# Altium PCB ISO_board.PcbDoc
Units mm, origin at the board's own origin, x right, y up, seen from the top; angles counter-clockwise.
Board outline 128 x 36.5 mm, 2 copper layers (Top Layer, Bottom Layer); 63 components, 30 nets, 190 pads, 299 vias.
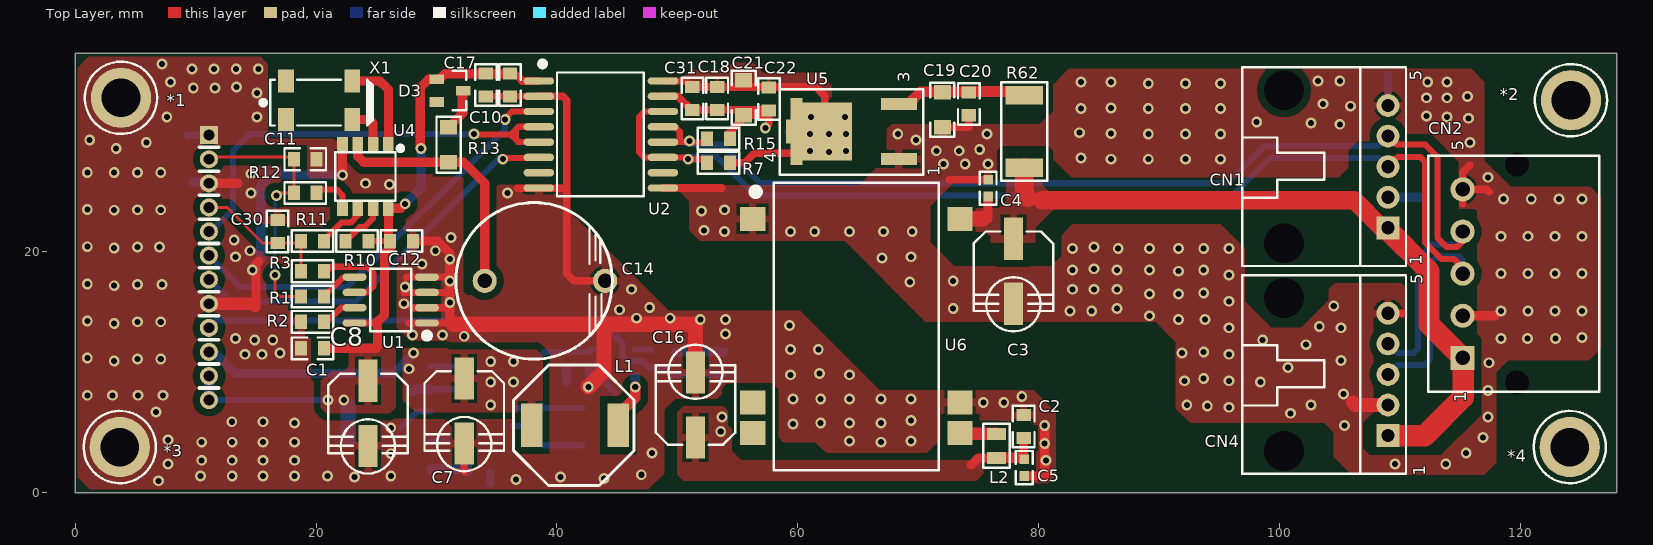
[diagram p0: Top Layer view]
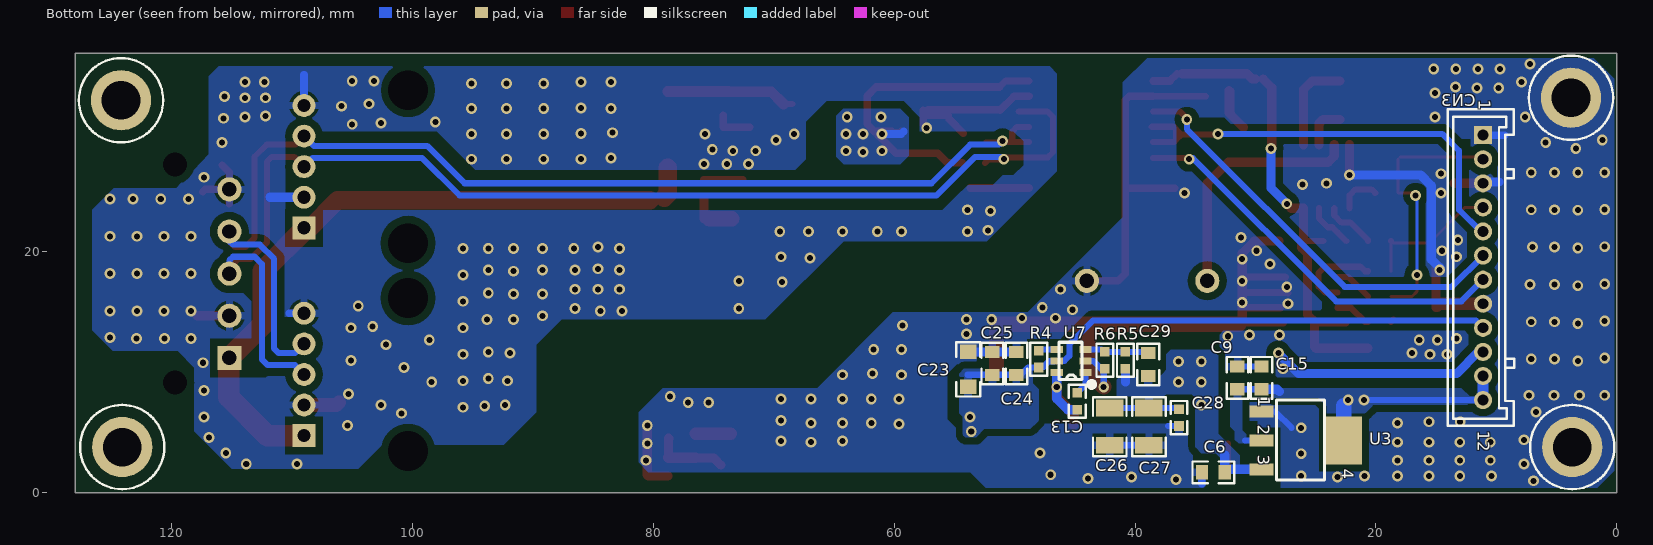
[diagram p1: Bottom Layer view, seen from below]

## Layer stack, top to bottom
Top Layer: signal copper 0.0356
Dielectric: dielectric 0.32, FR-4, Dk 4.8
Bottom Layer: signal copper 0.0356

## Board outline
0,0 0,36.5 128,36.5 128,0

## Design rules (kind name [scope] priority, off if disabled: settings)
Clearance Clearance_2 [IsRegion] p1: gap=0.6
Clearance Clearance_1 [(IsVia OR IsPad) vs (IsPad OR IsVia)] p2: gap=0.35
Clearance [All] p3: gap=0.3
ComponentClearance [All] p1 off: gap=0.254 collisioncheckmode=3 verticalgap=0.254 showdistances=FALSE
DiffPairsRouting [All] p1: maxlimit=0.762 minlimit=0.3 mostfreqgap=0.5 maxuncoupledlength=12.7
Height [All] p1 off: minheight=0 maxheight=25.4 prefheight=12.7
HoleSize [All] p1: absolutevalues=TRUE maxlimit=10 minlimit=0.025 maxpercent=80.000 minpercent=20.000
PolygonConnect PolygonConnect_4 [(InComponent('*1') OR InComponent('*3'))] p1: connectstyle=Direct reliefconductorwidth=0.254 reliefentries=4 polygonreliefangle="90 Angle"
PolygonConnect PolygonConnect_1 [(InComponent('CN1') OR InComponent('CN2') OR InComponent('CN3') OR InComponent('CN4') )] p2: connectstyle=Relief reliefconductorwidth=0.635 reliefentries=4 polygonreliefangle="90 Angle"
PolygonConnect [ISVIA] p3: connectstyle=Direct reliefconductorwidth=0.254 reliefentries=4 polygonreliefangle="90 Angle"
PolygonConnect PolygonConnect_2 [(InNet('FGND') OR InNet('PGND') OR InNet('+12V')  OR InNet('+5V') OR InNet('+3.3V') OR InNet('12VF') )] p4: connectstyle=Relief reliefconductorwidth=0.635 reliefentries=4 polygonreliefangle="90 Angle"
PolygonConnect PolygonConnect_3 [All] p5: connectstyle=Relief reliefconductorwidth=0.254 reliefentries=4 polygonreliefangle="90 Angle"
RoutingVias [All] p1: holewidth=0.5 width=0.9 viastyle="Through Hole" minholewidth=0.5 minwidth=0.9 maxholewidth=0.6 maxwidth=1
SilkToSilkClearance [All] p1 off: silktosilkclearance=0.254
SilkscreenOverComponentPads SilkToSolderMaskClearance [IsPad] p1 off: minsilkscreentomaskgap=0.254
SolderMaskExpansion [All] p1: expansion=0
Width [All] p1: maxlimit=10 minlimit=0.2 preferedwidth=0.3
22 further rules are at their usual default settings.

## Classes and differential pairs
component class U_Sheet2: C10 C17 C18 C31 R7 R15 U2
component class U_Sheet1: C2 C3 C4 C5 C6 C7 C9 C13 C15 C16 C19 C20 C21 C22 C23 C24 C25 C26 C27 C28 C29 L1 R4 R5 R6 R62 U3 U5 U6 U7
component class Top: C1 C11 C12 C14 C30 CN1 CN2 CN3 CN4 D3 R1 R2 R3 R10 R11 R12 R13 U1 U4 X1
differential pair 485: +RS485+ -RS485-

## Components (designator, comment, footprint, x,y, rotation, side; value= is the part's Value field where it differs from the comment)
*1 "Comment" SCREWFG3_2 3.8,32.8 r0 top
*2 "Comment" SCREWFG3_2 124.2,32.6 r0 top
*3 "Comment" SCREWFG3_2 3.7,3.8 r0 top
*4 "Comment" SCREWFG3_2 124.1,3.8 r0 top
C1 "CAP" C0805 19.7,12 r180 top
C2 "CAP" C0805 78.75,5.5 r90 top
C3 "CAPACITOR" CA6_6x5_8 77.9,18.4 r90 top
C4 "CAP" C0603 75.8,25.3 r270 top
C5 "CAP" C0603 78.8,2.1 r270 top
C6 "CAP" C0805 33.5,1.7 r0 bottom
C7 "CAPACITOR" CA6_6x5_8 32.3,6.8 r90 top
C8 "CAPACITOR" CA6_6x7_7 24.3,6.6 r90 top
C9 "CAP" C0805 31.5,9.55 r90 bottom
C10 "CAP" C0805 36.1,33.85 r270 top
C11 "CAP" C0805 19.1,27.7 r0 top
C12 "CAP" C0805 27.1,20.9 r0 top
C13 "CAP" C0603 44.8,7.6 r270 bottom
C14 "BATTERY" DXJ_5R5H334U 44,17.6 r180 top
C15 "CAP" C0805 29.5,9.55 r90 bottom
C16 "CAPACITOR" CA6_6x5_8 51.5,7.3 r270 top
C17 "CAP" C0805 34.1,33.85 r270 top
C18 "CAP" C0805 53.3,32.75 r90 top
C19 "CAP" C1206 72,31.8 r90 top
C20 "CAP" C0805 74.2,32.3 r270 top
C21 "CAP" C1206 55.5,32.8 r90 top
C22 "CAP" C0805 57.6,32.7 r270 top
C23 "CAP" C1206 53.85,10.25 r90 bottom
C24 "CAP" C0805 49.85,10.75 r90 bottom
C25 "CAP" C0805 51.85,10.75 r90 bottom
C26 "CAP" C1210 42.1,5.5 r270 bottom
C27 "CAP" C1210 38.85,5.5 r270 bottom
C28 "CAP" C0603 36.35,6.25 r270 bottom
C29 "CAP" C0805 38.9,10.65 r270 bottom
C30 "CAP" C0805 16.8,21.7 r90 top
C31 "CAP" C0805 51.25,32.75 r270 top
CN1 "Header 5" 70551-5P 109,22 r90 top
CN2 "Header 5" 532590529 115.2,11.2 r90 top
CN3 "Header 12" 353621276P2 11.1,29.7 r270 bottom
CN4 "Header 5" 70551-5P 109,4.75 r90 top
D3 "BAS40-00-V" SOT23-123 31,33.4 r270 top
L1 "Inductor" 1038 37.9,5.6 r270 top
L2 "Inductor" L0805 76.5,3.9 r270 top
R1 "RES" R0805 19.7,16.3 r0 top
R2 "RES" R0805 19.7,14.2 r180 top
R3 "RES" R0805 19.7,18.4 r0 top
R4 "RES" R0603 48,11.1 r90 bottom
R5 "RES" R0603 40.8,11 r270 bottom
R6 "RES" R0603 42.5,11 r90 bottom
R7 "RES" R0805 53.4,27.4 r180 top
R10 "RES" R0805 23.4,20.9 r0 top
R11 "RES" R0805 19.7,20.9 r180 top
R12 "RES" R0805 19.1,24.9 r180 top
R13 "RES" R1206 31,28.9 r270 top
R15 "RES" R0805 53.4,29.4 r0 top
R62 "RES" R2512 78.8,30 r90 top
U1 "M24M01" SOIC8 29.2,14.1 r90 top
U2 "ADM2484E" SOIC16 38.5,34.2 r270 top
U3 "LD1117-3.3" AS1117 29.5,6.75 r270 bottom
U4 "PCF8523T" SO-8 26,28.9 r270 top
U5 "LD1117-3.3" DPAK-134 63.8,30 r90 top
U6 "H1212LT-2W" H_LT-2W 56.25,22.75 r270 top
U7 "SY8113" TSOT23-6L 44.1,10 r90 bottom
X1 "MC306" MC306 23,31 r180 top

## Footprints (in the part's own frame and the unit in brackets; to place one, negate y for a bottom-side part, rotate by r counter-clockwise, add the part's x,y. Pads: shape width x height; smd on the part's side, far side on the other; paste and mask are expansions set on the pad)
1038 [mm]
  rect 3.6x1.8 smd: 1(0,7.2) 2(0,0)
  silkscreen extent -5,-1.5 5,8.5
70551-5P [mm] "15.21X13.6X7"
  round 0.2 hole 3.3 unplated: 0(-1.27,8.64) 0(11.43,8.64)
  rect 1.9x1.9 hole 1.1: 1(0,0)
  round 1.9 hole 1.1: 2(2.54,0) 3(5.08,0) 4(7.62,0) 5(10.16,0)
  silkscreen extent -3.17,-1.5 13.33,12.1, body extent -3.17,-1.5 13.33,12.1, height 7
353621276P2 [mm] "26.3X5.5X8.5"
  rect 1.5x1.5 hole 0.9: 1(0,0)
  round 1.5 hole 0.9: 2(2,0) 3(4,0) 4(6,0) 5(8,0) 6(10,0) 7(12,0) 8(14,0) 9(16,0) 10(18,0) 11(20,0) 12(22,0)
  silkscreen extent -2.16,-2.95 24.14,2.58, body extent -2.16,-2.95 24.14,2.55, height 8.5
532590529 [mm]
  round 0 hole 2 unplated: 0(-2.05,-4.5) 0(16.05,-4.5)
  rect 2x2 hole 1.2: 1(0,0)
  round 2 hole 1.2: 2(3.5,0) 3(7,0) 4(10.5,0) 5(14,0)
  silkscreen extent -2.8,-11.35 16.8,2.85, body extent -2.9,-11.45 16.9,2.95, height 8
AS1117 [mm]
  rect 1x2 smd: 1(0,0) 2(2.4,0) 3(4.8,0)
  rect 4x3 smd: 4(2.4,6.835)
  silkscreen extent -0.94,1.25 5.7,5.25, body extent -0.94,1.25 5.7,5.25, height 2.5
C0603 [mm]
  rect 0.8x0.8 smd: 1(-0.7,0) 2(0.7,0)
  silkscreen extent -1.38,-0.7 1.38,0.7
C0805 [mm]
  rect 1x1.2 smd: 1(-0.95,0) 2(0.95,0)
  silkscreen extent -1.73,-0.9 1.73,0.9, body extent -1.55,-0.7 1.55,0.7, height 1
C1206 [mm]
  rect 1.2x1.4 smd: 1(-1.45,0) 2(1.45,0)
  silkscreen extent -2.25,-1 2.25,1, body extent -2.3,-0.8 2.3,0.8, height 1
C1210 [mm]
  rect 1.4x2.3 smd: 1(-1.55,0) 2(1.55,0)
  silkscreen extent -2.45,-1.39 2.45,1.39, body extent -2.35,-1.25 2.35,1.25, height 2.5
CA6_6x5_8 [mm]
  rect 3.5x1.6 smd: 1(-2.7,0) 2(2.7,0)
  silkscreen extent -5,-3.3 3.3,3.3, body extent -3.3,-3.3 3.3,3.3, height 5.8
CA6_6x7_7 [mm]
  rect 3.5x1.6 smd: 1(-2.7,0) 2(2.7,0)
  silkscreen extent -5,-3.3 3.3,3.3
DPAK-134 [mm] "LD1117"
  rect 1x3 smd: 1(-2.285,-4.6) 3(2.285,-4.6)
  rect 0.4x1 smd: 4(-2.6,3.9) 4(2.6,3.9)
  rect 2x0.4 smd: 4(0,4.6)
  rect 4.8x5.1 smd: 4(0,1.85)
  silkscreen extent -3.58,-6.6 3.52,5.3, body extent -3.15,-6.45 3.15,5.15, height 2.4
DXJ_5R5H334U [mm] "12.4X4.5X5"
  round 2 hole 1.2: 1(0,0) 2(10,0)
  silkscreen extent -0.6,-6.5 12.4,6.5, body extent -0.25,-6.49 12.7,6.49, height 5
H_LT-2W [mm]
  rect 2x2.1 smd: 1(0,0) 7(15.24,0) 8(17.78,0) 9(17.78,17.22) 10(15.24,17.22) 16(0,17.22)
  silkscreen extent -3,-0.05 20.86,15.45, body extent -3,1.75 20.75,15.5, height 8
L0805 [mm] "2923451010"
  rect 1x1.6 smd: 1(-1,0) 2(1,0)
  silkscreen extent -1.83,-1.1 1.8,1.1, body extent -1.6,-0.9 1.6,0.9, height 1.6
MC306 [mm] "8X3.8X2.5"
  rect 1.3x1.9 smd: 1(0,-3.2) 2(5.5,-3.2) 3(5.5,0) 4(0,0)
  silkscreen extent -1.7,-3.3 7.6,0.5, body extent -0.75,-4.25 6.25,1.05, height 2.5
R0603 [mm]
  rect 0.8x0.8 smd: 1(-0.7,0) 2(0.7,0)
  silkscreen extent -1.38,-0.7 1.38,0.7
R0805 [mm]
  rect 1x1.2 smd: 1(-0.95,0) 2(0.95,0)
  silkscreen extent -1.73,-0.9 1.73,0.9, body extent -1.55,-0.7 1.55,0.7, height 1
R1206 [mm]
  rect 1.2x1.4 smd: 1(-1.45,0) 2(1.45,0)
  silkscreen extent -2.32,-1 2.32,1, body extent -2.15,-0.8 2.15,0.8, height 1
R2512 [mm]
  rect 1.55x3.1 smd: 1(-3,0) 2(3,0)
  silkscreen extent -4.1,-1.9 4.1,1.9, body extent -3.88,-1.65 3.88,1.65, height 1.2
SCREWFG3_2 [mm]
  round 5 hole 3.2: 1(0,0)
  silkscreen extent -3,-3 3,3, body extent -3.01,-3.01 3.01,3.01, height 7
SO-8 [mm] "SO-8, 8-Leads, Body 5.0x4.0mm (max), Pitch 1.27mm, IPC Medium Density"
  rect 1.27x0.88 smd: 1(0,0) 2(0,-1.27) 3(0,-2.54) 4(0,-3.81) 5(5.27,-3.81) 6(5.27,-2.54) 7(5.27,-1.27) 8(5.27,0)
  silkscreen extent 0.1,-4.41 4.63,1.2, body extent 0.63,-4.41 4.63,0.6, height 2
SOIC8 [mm]
  oval 0.61x2 smd: 1(0,0) 2(1.27,0) 3(2.54,0) 4(3.81,0) 5(3.81,6) 6(2.54,6) 7(1.27,6) 8(0,6)
  silkscreen extent -1.3,-0.25 4.51,4.7, body extent -0.7,1.3 4.51,4.7, height 1.75
SOIC16 [mil]
  oval 24x100 smd: 1(0,0) 2(50,0) 3(100,0) 4(150,0) 5(200,0) 6(250,0) 7(300,0) 8(350,0) 9(350,405.51) 10(300,405.51) 11(250,405.51) 12(200,405.51) 13(150,405.51) 14(100,405.51)
  oval 24.02x100 smd: 15(50,405.51) 16(0,405.51)
  silkscreen extent -64,4 378,343, body extent -28,59 378,342, height 39
SOT23-123 [mm]
  rect 0.8x1.2 smd: 1(-0.95,-1) 2(0.95,-1) 3(0,1.2)
  silkscreen extent -1.65,0.33 1.65,1.48, body extent -1.6,-1.3 1.6,1.3, height 1.2
TSOT23-6L [mm]
  rect 0.6x1 smd: 1(0,0) 2(0.95,0) 3(1.9,0) 4(1.9,2.4) 5(0.95,2.4) 6(0,2.4)
  silkscreen extent -1.2,-0.7 2.5,2.2, body extent -0.6,0.2 2.6,2.2, height 1

## Part data
C1 C6 C12 C17 C20 C22 C31: library part EC00014, "CAP SMD CR X7R 50V 10% 0.1uF 0805 ROHS"
C2 C9 C24: library part EC00002, "CAP SMD CR X7R 50V 10% 1uF 0805 ROHS"
C3 C7 C16: library part EC00074, "CAP SMD AL 35V 20% 47uF Low_ESR F61 ROHS"
C4 C5 C13 C28: library part EC00093, "CAP SMD XR7 50V 10% 100nF 0603 ROHS"
C8: library part EC00073, "CAP SMD AL 25V 20% 100uF Low_ESR F80 ROHS"
C10 C18: library part EC00037, "CAP SMD X7R 50V 10% 10nF 0805 ROHS"
C11 C30: library part EC00041, "CAP SMD C0G 50V 10% 10pF 0805 ROHS"
C14: library part EC00046, "CAP Super Capacitor,5.5V 0.33F 11.5X5MM ROHS"
C15 C25: library part EC00018, "CAP SMD CR X7R 50V 10% 10nF 0805 ROHS"
C19 C21 C23: library part EC00088, "CAP,CMCC,10uF,25V,10%,X7R,1206,SMD,ROHS"
C26 C27: library part EC00124, "CAP SMD MLCC X7R 16V 22uF 20% 1210 ROHS"
C29: library part EC00015, "CAP SMD C0G 50V 10% 22pF 0805 ROHS"
CN1 CN4: library part EJ00030, "CONNECTOR 5PIN,2.54PITCH,90 Degrees,PTH"
CN2: library part EJ00018, "CONNECTOR 5PIN,3.5PITCH,PTH,ROHS"
CN3: library part EJ00008, "CONNECTOR 12PIN,2.00PITCH,PTH,2A,125V,ROHS,MATE_WITH:35507"
D3: library part ED00028, "DIODE Schottky Diode 40V 0.2A SOT-23 SMD ROHS"
L1: library part EL00022, "INDUCTOR 10uH 3.6A 30% SMD 1038 ROHS"
L2: library part EL00005, "INDUCTOR 2.2uH 0.5A 20% SMD 0805 ROHS"
R1 R3 R11 R12: library part ER00085, "RES THICK_FILM SMD 51 OHM 5% 1/8W ROHS 0805"
R2 R10: library part ER00039, "RES THICK_FILM SMD 4.7K 5% 1/8W ROHS 0805"
R4: library part ER00176, "RES THICK_FILM 4.7K 5% 1/10W ROHS 0603"
R5: library part ER00221, "RES,THIN_FILM,100K,1%	,1/16W,±50ppm/℃,ROHS,0603,SM"
R6: library part ER00220, "RES,THIN_FILM,13.7K,1%	,1/16W,±50ppm/℃,ROHS,0603,SM"
R7 R15: library part ER00021, "RES THICK_FILM SMD 39K 5% 1/8W ROHS 0805"
R13: library part ER00017, "RES THICK_FILM SMD 300 OHM 1% 1/4W ROHS 1206"
R62: library part ER00212, "RES THICK_FILM SMD 75 ohm 5% 1W ROHS 2512"
U1: library part EU00047, "IC 1-Mbit serial I2C bus EEPROM"
U2: library part EU00059, "IC Isolated, RS-485/RS-422 transceiver,5kV,SOIC16_W,ROHS"
U3: library part EU00006, "IC REG VOLT +3.3V LDO 800MA SOT223 ROHS"
U4: library part EU00044, "IC Real-Time Clock (RTC) and calendar,SO8，ROHS"
U5: library part EU00066, "IC REG VOLT +3.3V LDO 800MA DPAK ROHS"
U6: library part EU00069, "IC DC/DC,12V->12V,2W,ISOLATION:6000VDC,23.86X18.10X8MM,ROHS"
U7: library part EU00068, "Regulator,500KHz,3A,18V Input,Synchronous Step Down,TSOT23-6"
X1: library part EX00004, "XTAL 8.0*3.8*2.5 32.768KHZ 6PF, +/-20PPM,SMD ROHS"

## Via types
v1: diameter 0.9, hole 0.5, Top Layer to Bottom Layer, 299 vias

## Nets (pads, with @x,y where several pads share a name; then routed paths per layer and width w, separated by ;. In a path a pad name is that pad's centre, name@x,y a point inside that pad or via, vN(x,y) a via of type N, cw(c..) or ccw(c..) an arc to the next point about the centre after c; other vN are vias at no path point)
3.3VF: C18.2 C21.2 C22.1 C31.1 R7.1 U2.16 U5.4 | length 29.2
  Top Layer w0.559: U2.16 50.75,34.2 C31.1
  Top Layer w0.635: C31.1 C18.2 61.5,33.7 62.25,32.95 62.25,30.6 61.65,30 U5.4@60.2,30 ; R7.1 55.6,27.4 56.4,28.2 59.85,28.2 U5.4@61.325,29.675 ; U5.4@59.4,30 59.5,29.9 U5.4@60.1,29.9
  Bottom Layer w0.635: 59.2,30 59.4,29.8 v1(61,29.8)
  other v1: 62.6,28.3 61,28.4 64,28.4 62.6,29.8 64,29.8 61.1,31.2 63.9,31.2
12VF: C3.2 C4.2 CN1.1 CN2.1 CN4.1 R62.1 U6.16 | length 60.6
  Top Layer w0.762: 75.8,22.75 C4.2@75.8,24.5
  Top Layer w1.27: U6.16 75.35,22.75 75.4,22.8
  Top Layer w1.524: R62.1 78.8,24.8 79.1,24.5 ; 80.3,24.3 106.2,24.3 108.5,22 CN1.1@108.824,22
  Top Layer w1.778: CN1.1@108.824,22 112.412,18.412 112.412,13.988 CN2.1 ; CN4.1 112.05,4.75 115.25,7.95 CN2.1@115.25,11.2
  Bottom Layer w0.762: CN2.1@114.75,11.75 CN2.1@115.25,11.75
+3.3V: C1.1 C8.2 C9.1 C10.1 C12.1 C15.1 C17.1 CN3.11 CN3.12 D3.1 R10.2 U1.8 U2.1 U3.2 U3.4 U4.8 | length 61.9
  Top Layer w0.508: R10.2 C12.1 C12.1@26,21.05 ; v1@28.646,28.654 v1(28.7,28.6)
  Top Layer w0.61: U1.8@22.5,14.1 U1.8 25,14.1 ; 25,12 25.1,12.1
  Top Layer w0.635: C10.1@36.5,34.8 37.1,34.2 U2.1
  Top Layer w0.762: C1.1 25,12 ; 25,14.1 25.689,14.789 25.689,19.889 26.15,20.35 C12.1 ; 25.1,12.1 25.1,14.1 ; C12.1@26,21.05 U4.8 27.03,23.63 v1(27.4,24) ; v1@28.646,28.654 28.646,33.646 29.35,34.35 ; D3.1 30.25,34.35 30.7,34.8 C17.1 C10.1
  Bottom Layer w0.508: CN3.12 v1(21,7.7) ; U3.2 30.85,4.35 ; C15.1 C9.1
  Bottom Layer w0.762: v1(27.4,24) 28.7,25.3 v1(28.7,28.6) ; 28,8.4 28.2,8.6 C15.1
  Bottom Layer w0.889: CN3.12 CN3.11
  Bottom Layer w1.27: U3.4 22.665,7.235
  other v1: 22.3,7.7
+5V: C6.1 C7.2 C26.1 C27.1 C28.1 C29.2 CN3.10 L1.2 R5.2 U3.3 | length 30.1
  Bottom Layer w0.508: C28.1@36.5,7.05 C27.1 ; C27.1@38.6,7.3 C27.1 ; C26.1 C27.1
  Bottom Layer w0.762: CN3.10 11.5,11.7 13.3,9.9 26.4,9.9 v1(28.1,11.6) ; U3.3 32.3,1.95 C6.1 32.55,3.15 ; 40.8,9.2 R5.2
  other v1: 34.5,7.3 34.5,9.2 36.4,9.2 27.7,10.3 34.5,10.9 36.4,10.9
+12V: C2.1 C5.1 C16.2 C23.1 C24.1 C25.1 CN3.9 L2.2 R4.1 U7.5 | length 51.8
  Top Layer w0.762: 74.4,2.3 75,2.9 L2.2 ; C2.1@78.7,4.5 C2.1 C5.1@78.75,2.9
  Top Layer w0.889: L2.2 C5.1@78.75,2.9
  Bottom Layer w0.508: CN3.9 11.7,14.3 43.5,14.3 45.446,12.354 45.446,11.371 45.867,10.95 U7.5 ; U7.5@46.684,10.924 47.159,10.924 47.681,10.402 47.85,10.402 48.898,10.402 49.5,9.8 C24.1 C25.1 53.9,9.8 ; v1(53.7,6.3) 53.8,6.3 v1@53.85,6.25
  other v1: 53.6,5.1
FGND: C3.1 C4.1 C18.1 C19.1 C20.2 C21.1 C22.2 C31.2 CN1.2 CN1.5 CN2.2 CN2.5 CN4.2 CN4.5 R15.2 U2.9 U2.15 U5.1 U6.1 | length 44.9
  Top Layer w0.635: U2.9 53.69,25.31 ; U2.15 50.047,32.93 C31.2@51.213,31.763 ; C31.2@51.15,31.8 C18.1 C22.2@57.2,31.8 ; R15.2@54.25,29.85 C21.1@55.4,31 ; C21.1 57.2,31.35 C22.2 57.6,30.6 v1(57.3,30.3) ; C19.1 74.2,30.35 C20.2 ; 72.6,26 C4.1 ; CN4.2@108.31,7.29 CN4.2 ; CN4.5 110.198,14.91 ; 115.2,24 CN2.5 ; 115.8,27.2 115.2,26.6 CN2.5 ; 117.4,25 117.2,25.2 CN2.5
  Top Layer w0.762: CN2.2 117.9,14.7
  Top Layer w1.143: 106.1,7.5 106.31,7.29 CN4.2@108.31,7.29
  Bottom Layer w0.635: CN4.5 110.214,14.91 ; CN1.5 109,34.7
  Bottom Layer w0.762: CN1.2 111.84,24.54
  other v1: 109.6,2.4 113.8,2.4 115.5,3.3 116.9,4.6 105.4,5.6 117.3,6.3 100.9,6.6 95.8,7.1 94,7.2 92.3,7.3 102.6,7.3 105.3,8.2 117.3,8.5 98.4,9.2 92.1,9.3 95.8,9.3 93.7,9.5 100.7,10.4 117.4,10.8 105.1,11 95.8,11.5 91.9,11.6 93.7,11.7 102.2,12.3 98.6,12.7 118.4,12.8 120.6,12.8 122.9,12.8 125.1,12.9 95.8,13.7 105.1,13.7 103.3,13.8 91.6,14.4 93.8,14.4 89.2,14.7 82.6,15.1 84.4,15.1 118.4,15.1 120.633,15.1 122.867,15.1 125.1,15.1 72.9,15.3 86.5,15.3 104.5,15.517 95.8,15.9 89.2,16.5 91.6,16.5 93.7,16.6 82.8,16.9 84.6,16.9 86.5,16.9 69.3,17.5 72.9,17.6 95.8,18.1 118.4,18.2 120.633,18.2 122.867,18.2 125.1,18.2 91.6,18.4 82.8,18.5 86.5,18.5 89.2,18.5 93.7,18.5 84.6,18.6 67,19.5 69.4,19.6 82.8,20.3 86.6,20.3 89.2,20.3 91.6,20.3 93.7,20.3 95.8,20.3 84.6,20.4 118.4,21.3 120.633,21.3 122.867,21.3 125.1,21.3 53.9,21.7 59.4,21.7 61.4,21.7 64.3,21.7 67.1,21.7 69.5,21.7 52.2,21.8 52,23.4 53.9,23.5 118.6,24.4 120.9,24.4 123.2,24.4 125.1,24.4 117.3,26.2 72.1,27.3 73.9,27.3 75.8,27.3 86,27.7 89.1,27.7 92.2,27.7 95.1,27.7 83.5,27.8 71.5,28.4 73.4,28.4 75.1,28.5 115.8,29.1 69.8,29.3 68.3,29.8 75.7,29.8 89.1,29.8 92.2,29.8 95.1,29.8 86,29.833 83.4,29.9 105,30.6 102.6,30.7 98.1,30.8 115.7,31.1 113.9,31.2 112.2,31.3 83.5,31.9 89.1,31.9 92.2,31.9 95.1,31.9 86,31.967 105.9,32.1 103.6,32.3 112.2,32.8 113.9,32.8 115.6,32.9 89.1,34 92.2,34 95.1,34 83.5,34.1 86,34.1 112.3,34.1 113.9,34.1 103.2,34.2 105,34.2
NetC13_1: C13.1 U7.1 | length 2
  Bottom Layer w0.508: U7.1 44.1,9 C13.1
NetC13_2: C13.2 L1.1 U7.6 | length 7.7
  Top Layer w0.762: L1.1 L1.1@45.1,6.5 ; 46.4,7.8 46.5,7.9
  Top Layer w0.889: L1.1@45.1,6.5 46.4,7.8 ; 46.5,7.9 v1(46.5,8.8)
  Bottom Layer w0.762: C13.2 45.583,6.9 46.5,7.817 v1(46.5,8.8) U7.6@46.5,9.7
NetC14_2: C14.2 R13.2 U4.3 | length 20.6
  Top Layer w0.762: U4.3 23.46,27.94 23.95,27.45 R13.2 32.25,27.45 34,25.7 34,17.8 C14.2@33.8,17.6
NetC19_2: C19.2 C20.1 R62.2 U5.3 | length 10.8
  Top Layer w0.508: U5.3@68.45,32.285 U5.3@69.185,32.285 ; C20.1@73.725,33.3 C20.1@73.75,33.325
  Top Layer w0.889: U5.3@69.185,32.285 70.2,33.3 C20.1@73.725,33.3 ; C20.1@73.75,33.325 R62.2@78.8,33.325
NetC29_1: C29.1 R5.1 R6.2 U7.3 | length 5
  Bottom Layer w0.508: C29.1 39,11.7 40.9,11.7 R6.2@42.6,11.7 ; R6.2@42.8,11.9 U7.3
NetD3_3: D3.3 R13.1 | length 5.6
  Top Layer w0.508: 32,31.35 D3.3@32,33.4
  Top Layer w0.762: R13.1 32,31.35 32.2,31.55 D3.3
NetL2_1: L2.1 U6.9 | length 3
  Top Layer w1.016: U6.9@73.54,4.9 L2.1
NetR1_2: R1.2 U1.5 | length 3.2
  Top Layer w0.508: R1.2 22.26,17.91 U1.5
NetR2_1: R2.1 U1.7 | length 3
  Top Layer w0.508: R2.1 20.9,14.2 22.07,15.37 U1.7
NetR3_2: R3.2 U1.6 | length 7.3
  Top Layer w0.508: R3.2 20.9,18.4 21.269,18.769 24.251,18.769 24.754,18.266 24.754,17.154 24.24,16.64 U1.6
NetR4_2: R4.2 U7.4 | length 1.4
  Bottom Layer w0.508: U7.4 47.752,11.9 R4.2@47.85,11.802
NetR10_1: R10.1 U4.7 | length 3.9
  Top Layer w0.508: R10.1 23.15,21.6 23.161,21.6 23.615,22.054 23.984,22.054 24.73,22.8 U4.7
NetR11_1: R11.1 U4.6 | length 4.3
  Top Layer w0.508: R11.1 20.65,20.983 22.108,22.441 22.859,22.441 23.46,23.042 U4.6
NetR12_1: R12.1 U4.5 | length 3.5
  Top Layer w0.508: R12.1 20.35,25.2 21.7,25.2 22.19,24.71 U4.5
NetU4_1: U4.1 X1.1 | length 7.9
  Top Layer w0.762: X1.1 25.3,34.2 26,33.5 U4.1
NetU4_2: U4.2 X1.4 | length 3.6
  Top Layer w0.762: X1.4 24.4,31 24.73,30.67 U4.2
PGND: *1.1 *3.1 C1.2 C2.2 C5.2 C6.2 C7.1 C8.1 C9.2 C10.2 C11.2 C12.2 C14.1 C15.2 C16.1 C17.2 C23.2 C24.2 C25.2 C26.2 C27.2 C28.2 C30.2 CN3.1 CN3.3 CN3.8 R2.2 R6.1 U1.1 U1.2 U1.3 U1.4 U2.2 U2.8 U3.1 U4.4 U6.10 U7.2 | length 138.7
  Top Layer w0.508: R2.2@18.55,14.4 R2.2 ; 31,14.1 31.1,14 ; 32.3,1.7 C7.1 ; C17.2 34.13,32.93 U2.2
  Top Layer w0.6: 27.3,16.6 27.34,16.64 U1.3 31.06,16.64 31.1,16.6 v1(31.1,15.8) ; 27.5,17.9 27.51,17.91 U1.4 31.01,17.91 v1@31.1,18 ; 27.7,14.1 U1.1 31,14.1 ; 27.935,15.37 U1.2 v1@31.1,15.37
  Top Layer w0.635: 36.7,25.3 40.8,25.3 ; U2.2 40.47,32.93 40.8,32.6 40.8,25.3 ; C14.1@43.8,17.6 41.4,17.6 40.8,18.2 40.8,25.3
  Top Layer w0.762: CN3.3 13.5,25.7 ; 14.6,15.7 14.9,15.4 15,15.4 15,19 15.231,19.231 ; U4.4 22.2,28.89 v1(22.2,26.4) ; C12.2 30.1,20.9 31.1,19.9 31.1,18 31.1,16.6 31.1,15.37 31.1,14 ; C14.1@43.8,17.6 C14.1@43.9,17.5 ; C5.2 80.4,1.4 80.5,1.5 80.5,5.1
  Top Layer w1.016: CN3.8 14.6,15.7
  Top Layer w1.27: 31.4,14 43.9,14 ; v1(42.6,8.8) 43.9,10.1 43.9,14 ; C16.1 51.5,13 51.5,13.8 51.3,14 43.9,14
  Bottom Layer w0.508: 27,5.4 28.35,6.75 U3.1 ; C15.2 C9.2 ; C28.2 37.25,5.55 ; C27.2 C26.2 ; v1@42.7,8.7 v1(42.6,8.8) 42.6,10.3 42.817,10.3 43.467,10.95 U7.2
  Bottom Layer w0.635: 9.3,29.7 CN3.1 ; 34.45,0.775 C6.2
  Bottom Layer w0.762: 9.8,25.8 11,25.8 CN3.3 ; v1(14.7,18.5) 14.7,18.7 15.4,19.4 15.4,25.5 16.3,26.4 v1(22.2,26.4) ; C24.2 C25.2 C23.2
  other v1: 6.9,1 36.6,1.1 43.9,1.2 23.2,1.3 40.3,1.3 10.4,1.4 13.033,1.4 15.6,1.4 18.2,1.4 20.933,1.4 26.2,1.4 47,1.5 7.7,2.4 10.5,2.7 13.033,2.7 15.6,2.7 18.2,2.7 80.6,2.7 26.2,3.25 47.9,3.3 80.5,4.1 10.5,4.2 13.033,4.2 15.6,4.2 18.2,4.2 66.9,4.2 64.3,4.3 69.4,4.3 7.7,4.4 26.2,5.4 80.5,5.6 59.6,5.7 18.2,5.8 61.9,5.8 64.3,5.8 66.9,5.8 13,5.9 15.6,5.9 69.4,6 6.7,6.7 75.4,7.51 77.1,7.51 59.6,7.8 61.9,7.8 64.3,7.8 66.9,7.8 69.4,7.8 78.6,8 1,8.1 3.1,8.1 5.2,8.1 7.3,8.1 59.4,9.8 64.3,9.8 61.8,9.9 3.233,10.933 5.167,11.1 7.1,11.1 1,11.183 14.1,11.5 15.5,11.5 17,11.6 59.4,11.9 61.7,11.9 14.9,12.7 16.4,12.7 13.3,12.8 32.3,13 28,13.1 30.5,13.1 54,13.2 59.3,13.9 3.233,14.067 5.167,14.2 7.1,14.2 1,14.267 51.9,14.4 54,14.4 46.6,14.5 49.4,14.5 45.2,15.2 47.7,15.4 27.3,15.7 46.2,16.9 27.4,17.1 3.233,17.2 5.167,17.3 7.2,17.3 1,17.35 31.1,17.6 28.8,19 31.1,19.4 13.3,19.6 14.5,20.1 29.9,20.1 3.233,20.333 5.167,20.4 7,20.4 1,20.433 13.2,21 31.2,21.2 3.233,23.467 1,23.517 5.167,23.5 7.1,23.5 14.6,24.9 35.9,24.9 26.1,25.6 24.1,25.7 14.6,26.5 1,26.6 3.233,26.6 5.167,26.6 7.1,26.6 3.4,28.6 5.9,29.1 1.2,29.3 7.6,31.2 15.1,31.2 15.1,33.2 9.8,33.6 11.6,33.6 13.4,33.7 7.9,34.1 9.7,35.2 11.533,35.2 13.367,35.2 15.2,35.2 7.2,35.6
RS485+: CN1.3 CN2.3 CN4.3 R7.2 U2.11 U2.14 | length 103.2
  Top Layer w0.508: U2.14@49.685,31.66 U2.14 47.26,31.66 46.8,31.2 46.8,28.3 47.25,27.85 U2.11 v1@50.75,27.85 ; v1(50.9,27.7) 52.15,27.7 R7.2 ; CN1.3 109.82,27.9 111.7,27.9 112.092,27.508 112.092,20.773 113.465,19.4 114.5,19.4 CN2.3@115.1,18.8
  Bottom Layer w0.508: v1(50.9,27.7) 51.1,27.9 53.274,27.9 56.482,24.692 96.092,24.692 99.2,27.8 108.28,27.8 CN1.3 ; CN4.3 109.77,10.6 112.026,10.6 112.5,11.074 112.5,11.574 112.508,11.582 112.508,12.418 112.5,12.426 112.5,19 113.1,19.6 114.9,19.6 115.2,19.3 CN2.3
RS485-: CN1.4 CN2.4 CN4.4 R15.1 U2.12 U2.13 | length 98.1
  Top Layer w0.508: U2.12 50.12,29.12 ; U2.13 49.81,30.39 50.2,30 50.2,29.2 50.12,29.12 ; v1@50.88,29.12 50.12,29.12 ; v1(51,29.2) 51,29.1 R15.1@52.35,29.1 ; CN1.4 109.712,28.908 112.118,28.908 113.1,27.926 113.1,21.19 113.882,20.408 114.708,20.408 115.2,20.9 CN2.4
  Bottom Layer w0.508: v1(51,29.2) 51.292,28.908 53.692,28.908 56.9,25.7 95.674,25.7 98.782,28.808 108.188,28.808 CN1.4 ; CN4.4 109.762,11.608 111.108,11.608 111.5,12 111.492,12.008 111.492,19.418 112.682,20.608 114.9,20.608 CN2.4@115.2,20.908 ; CN2.4@114.8,21.1 115.25,21.55 CN2.4@115.25,22.25
RS485_EN: CN3.5 U2.4 U2.5 | length 37.5
  Top Layer w0.508: v1@33.45,29.75 36.15,29.75 ; 36.6,30.1 36.6,29.75 ; U2.5 36.78,29.12 36.6,29.3 ; U2.4@38.61,30.4 36.8,30.4 36.6,30.2 36.15,29.75 ; 36.15,29.75 36.6,29.75 ; 36.15,29.75 36.6,29.3 ; 36.6,29.3 36.6,29.75
  Bottom Layer w0.508: CN3.5 11.3,21.7 13.1,23.5 13.1,28.4 14.5,29.8 v1(33.1,29.8)
RX: CN3.6 U2.3 | length 34.9
  Top Layer w0.508: v1@35.7,31.1 36.26,31.66 U2.3
  Bottom Layer w0.508: CN3.6 13.704,17.096 22.596,17.096 35.7,30.2 v1(35.7,31)
SCL: C30.1 CN3.4 R3.1 R11.2 | length 11.4
  Top Layer w0.254: CN3.4 12.6,23.7 15.55,20.75 C30.1 18.6,20.75 R11.2 R3.1
SDA: C11.1 CN3.2 R1.1 R12.2 | length 21.2
  Top Layer w0.254: CN3.2@11.3,27.9 C11.1@18,27.9 ; v1(16.6,18.1) 16.6,16.7 17,16.3 R1.1 ; v1@16.9,24.9 R12.2 C11.1
  Top Layer w0.762: CN3.2 CN3.2@11.3,27.9
  Bottom Layer w0.254: v1(16.6,18.1) v1@16.6,24.6
  other v1: 16.7,24.7
TX: CN3.7 U2.6 | length 32.6
  Top Layer w0.508: v1@35.5,27.8 U2.6@38.5,27.8
  Bottom Layer w0.508: CN3.7@11.25,17.55 12.9,15.9 23.3,15.9 v1@35.2,27.8
  other v1: 35.5,27.7
pads on no net: *2.1 *4.1 CN1.0 CN2.0 CN4.0 D3.2 U2.7 U2.10 U6.7 U6.8 X1.2 X1.3

## Polygon pours and split planes (outlines as drawn)
FGND on Top Layer "Bottom Layer-No Net" (solid, remove dead copper, pour order 33): 104.8,4.7 103.7,5.8 92.6,5.8 91.4,7 91.4,12.5 89.7,14.2 70.6,14.2 63.876,20.918 51.9,20.9 51,21.8 51,24.2 50.2,25 50.1,25.555 65.082,25.555 67.395,27.874 67.4,30.2 67.8,30.6 80.1,30.6 81.4,31.9 81.4,28.2 81.2,28.4 80.8,28.8 76.9,28.8 76.5,28.4 76.5,25.9 73.1,25.9 71,23.8 71,20.8 73,18.8 81,18.8 81.9,19.7 81.9,21.4 82.8,22.3 95.1,22.3 97.1,20.3 97.1,15.9 99.3,13.7 101.8,13.7 104.1,16 104.1,16.9 104.6,17.4 106.8,17.4 106.8,4.7
3.3VF on Top Layer "Bottom Layer-No Net" (solid, remove dead copper, pour order 21): 51.1,35.1 54,35.1 54.6,35.7 56.3,35.7 57.1,34.9 61.7,34.9 62.8,33.8 62.8,32.7 62.6,32.4 62.1,32.6 62.1,33.4 61.6,33.9 50.5,33.9 50.3,34.1 50.3,34.3
PGND on Top Layer "Bottom Layer-No Net" (solid, remove dead copper, pour order 36): 1.2,0.3 0.2,1.3 0.2,35.287 1.1,36.2 15.4,36.2 16,35.6 16,29.6 16.2,29.4 22.3,29.4 22.3,28.4 23.5,26.6 32.2,26.6 32.2,12.5 26.2,12.5 26.2,6.132 30.6,6.132 31.3,5.429 31.3,4.7 32.3,4.7 32.3,0.3
FGND on Top Layer "Bottom Layer-No Net" (solid, remove dead copper, pour order 25): 114.9,28 116.6,28 119.2,25.4 125.8,25.4 126.7,24.5 126.7,12 125.7,11 119,11 118,10 118,2.5 117,1.5 106,1.5 104.5,3 104.5,15.9 106,17.4 110.1,17.4 110.6,16.9 110.6,14.5 107.8,14.5 107.8,6.7 106.9,5.8 106.9,3.7 107.5,3.1 113.4,3.1 116.8,6.5 116.8,12.8 116.4,13.2 116.4,14.4 115.2,14.4 115.2,15 116.4,15 116.4,23.4 116.2,23.6 114.9,23.6
+5V on Top Layer "Bottom Layer-No Net" (solid, remove dead copper, pour order 24): 38.8,6.7 28.274,6.7 27.2,7.7 27.2,12 38.173,12 38.8,11.38
+12V on Top Layer "Bottom Layer-No Net" (solid, remove dead copper, pour order 22): 53.8,7.2 50.5,7.2 50,6.7 50,1.5 50.5,1 74.8,1 75.4,1.6 75.4,2.7 55.3,2.7 54.5,3.5 54.5,5.3 54.2,5.6 54.2,6.8
12VF on Top Layer "Bottom Layer-No Net" (solid, remove dead copper, pour order 20): 74.5,23.625 76.7,23.625 77.3,24.242 77.3,26.3 80.3,26.3 80.3,25.58 81.1,24.757 81.2,24.654 81.2,23.5 79.7,22 79.7,20 78.7,19 76.9,19 76,19.9 76,21.258 75.7,21.567 75.6,21.67 74.5,21.67
PGND on Top Layer "Bottom Layer-No Net" (solid, remove dead copper, pour order 30): 31.2,17.7 32.516,16.4 34.439,16.4 34.439,24.9 35.147,25.6 40.6,25.6 40.6,23.8 49.3,15.1 60.2,15.1 66.8,8.5 79.6,8.5 81.4,6.7 81.4,1.4 80.798,0.8 79.4,0.8 79.4,6 71.9,6 71.9,4.5 70.7,3.3 62.373,3.3 61.462,4.2 58.8,4.2 58.4,4.6 58.4,8.6 57.9,9.1 54.1,9.1 53.7,8.7 53.7,8.2 53.3,7.8 49.812,7.812 48.9,6.9 48.912,6.4 48.912,1.6 47.6,0.3 31.2,0.3
FGND on Top Layer "Bottom Layer-No Net" (solid, remove dead copper, pour order 27): 115.9,35.2 117,34.1 117,27.3 115.1,27.3 112.6,29.8 109.9,29.8 108.3,29.2 106.5,29.2 105.7,28.4 105.7,27 104.9,26.2 82.7,26.2 81.2,27.7 81.2,33.9 82.5,35.2
+3.3V on Top Layer "Bottom Layer-No Net" (solid, remove dead copper, pour order 28): 20.837,6.6 26.1,6.6 26.6,7.119 26.6,11.889 26.3,12.2 23.2,12.2 22.7,11.7 22.7,10.5 22.3,10.1 21.2,10.1 20.4,9.296 20.4,7.041
+12V on Bottom Layer "Bottom Layer-No Net" (solid, remove dead copper, pour order 23): 54.6,6.6 54.6,9.9 54.2,10.3 48.508,10.3 48.5,9.1 48,8.6 48,6 48.7,5.3 52.5,5.3 53.2,4.6 54.1,4.6 54.3,4.8 54.3,6.3
+5V on Bottom Layer "Bottom Layer-No Net" (solid, remove dead copper, pour order 19): 28.1,11.6 28.4,11.3 28.4,10.4 28.4,9.8 28.2,9.6 27.6,9.6 26.5,9.6 26.3,9.8
+5V on Bottom Layer "Bottom Layer-No Net" (solid, remove dead copper, pour order 26): 41.5,8 41.5,9.4 41.3,9.6 38,9.6 37.7,9.9 37.4,10.2 37.4,11.5 37,11.9 33.6,11.9 33.1,11.4 33.1,4.9 31.3,3.1 31.3,1.645 32.5,1.645 32.7,1.9 32.7,2.7 33.3,3.3 34.5,3.3 35,3.8 35,7.9 35.3,8.2 37.4,8.2 37.6,8
+3.3V on Bottom Layer "Bottom Layer-No Net" (solid, remove dead copper, pour order 35): 32.1,8.4 32.1,5.5 31.7,5.1 31.7,4.4 31.4,4.1 30.6,4.1 30.6,4.7 31.1,5.2 31.1,8.4
+3.3V on Bottom Layer "Bottom Layer-No Net" (solid, remove dead copper, pour order 31): 28.5,8.7 12.9,8.7 12.1,7.9 12.1,7.6 12.4,7.3 20.2,7.3 20.9,6.6 24.1,6.6 24.1,7.2 24.8,7.9 28.5,7.9
3.3VF on Bottom Layer "Bottom Layer-No Net" (solid, remove dead copper, pour order 29): 64.2,31.9 64.8,31.3 64.8,27.9 64.2,27.3 59.5,27.3 58.8,28 58.8,31.2 59.5,31.9
FGND on Bottom Layer "Bottom Layer-No Net" (solid, remove dead copper, pour order 34): 47.1,35.4 116.1,35.4 116.9,34.6 116.9,28.1 119.6,25.3 124.8,25.3 126.6,23.5 110.5,23.5 110.5,29.8 107.7,29.8 107.5,30 98,30 94.8,26.8 68.2,26.8 67.3,27.7 67.3,30.8 65.6,32.5 59.2,32.5 57.9,31.2 57.9,30 50.1,30 49.3,29.2 49.3,27.2 50.1,26.4 51,26.4 51.8,25.6 53.9,25.6 55,24.5 56,23.5 126.6,23.5 126.6,13.5 124.9,11.8 119.5,11.8 118.1,10.4 118.1,5.1 115,2 104.5,2 102.5,4 92.4,4 89.7,6.7 89.7,12.3 87.6,14.4 70.7,14.4 64.2,20.9 52.3,20.9 48.6,24.6 47.7,25.5 46.5,26.7 46.5,34.8
PGND on Bottom Layer "Bottom Layer-No Net" (solid, remove dead copper, pour order 32): 39,36.1 41,34.083 41,22.889 48.9,15 60.1,15 66.4,8.7 79.2,8.7 81.2,6.7 81.2,2.518 80.4,1.711 53.7,1.711 52.4,0.4 1.6,0.4 0.2,1.812 0.2,34.386 1.9,36.1

## Other copper
Top Layer:
  pour cut-out: 28.045,16.957 28.045,17.592 30.355,17.592 30.355,16.957
  pour cut-out: 28.045,15.687 28.045,15.688 28.045,16.322 30.355,16.322 30.355,15.687
  pour cut-out: 30.355,15.052 30.355,14.418 30.355,14.417 28.045,14.417 28.045,15.052
  pour cut-out: 26.678,14.789 26.678,13.732 27.799,12.612 27.687,12.5 26.861,12.5 26.761,12.6 26.1,12.6 26.1,12.801 26.089,12.812 26.089,13.79
  pour cut-out: 31.971,12.508 31.967,12.512 31.2,12.512 31.2,12.3 31.279,12.379 31.88,12.379 32.012,12.512
  pour cut-out: 73.346,30.596 72.704,30.596 72.7,30.6 72.7,31.1 72.854,31.1 72.954,31.2 73.346,31.2
  pour cut-out: 75.4,30.596 75.054,30.596 75.054,31.2 75.4,31.2
  pour cut-out: 19.55,10.8 19.857,11.107 21.75,11.107 21.75,11.15 22.1,11.5 22.12,11.48 22.44,11.48 22.488,11.432 22.447,11.39 22.447,10.512 21.112,10.512 19.948,9.348 19.818,9.348 19.818,9.229 19.788,9.2 19.55,9.438
  pour cut-out: 19.068,13.346 19.504,13.346 19.55,13.3 19.55,12.854 19.068,12.854
  pour cut-out: 15.946,22.333 15.005,22.333 15.6,21.737 15.6,21.7 15.75,21.7 15.946,21.896
  pour cut-out: 17.05,26.5 17.05,26.1 17.417,26.1 17.417,26.5
  pour cut-out: 19.25,26.5 19.25,26.35 19.5,26.1 18.883,26.1 18.883,26.494 18.889,26.5
  pour cut-out: 17.05,28.9 12.104,28.9 12.104,28.633 17.05,28.633
  pour cut-out: 50.5,7.812 49.812,7.812 48.9,6.9 48.9,1.4 49.041,1.541 49.041,5.941 50.5,7.4
  pour cut-out: 78.954,20.782 79.7,20.782 79.7,20 79.071,19.371 79.023,19.42 78.954,19.42
  pour cut-out: 76.846,19.22 76.797,19.171 76.729,19.171 76,19.9 76,20.782 76.846,20.782
  pour cut-out: 27.25,22.1 26.989,22.1 26.989,22.395 27.04,22.395 27.04,22.642 27.142,22.744 27.455,22.744 27.455,22.305
Bottom Layer:
  pour cut-out: 12.303,15.282 12.5,15.2 12.291,15.19 12.248,15.147 11.589,15.147 11.589,16.089 11.6,16.1
  pour cut-out: 54.804,10.846 54.804,10.696 55.6,9.9 55.6,6.1 54.9,5.4 54.9,6.9
  pour cut-out: 12.7,13.5 12.322,13.122 12.322,12.277 12.023,12.277 12,12.3 12.063,12.363 12.063,12.737 12.279,13.019 12.2,13.5
  pour cut-out: 115.2,16.592 114.031,16.592 113.361,15.923 113.361,18.961 113.4,19 113.66,18.74 113.66,18.637
  pour cut-out: 113.6,12.8 113.361,12.8 113.246,12.685 113.246,10.644 112.931,10.644 112.026,9.739 112.164,9.6 113.6,9.6
  pour cut-out: 24.4,15.8 24.5,15.882 24.5,15.3 24.639,15.161 23.839,15.161 23.8,15.2 23.882,15.282 23.897,15.282
  pour cut-out: 50.996,10.3 50.704,10.3 50.704,9.046 50.996,9.046
  pour cut-out: 12.104,29.382 12.864,29.382 12.864,29.194 12.1,28.429 12.1,28.651 12.104,28.655
  pour cut-out: 12.453,21.635 12.453,19.581 12.445,19.573 12.063,19.955 12.063,20.737
  pour cut-out: 30.6,9.7
  pour cut-out: 27.9,0.85 31.1,0.85 31.1,0.961 31.45,0.961 31.45,0.49 31.36,0.4 27.9,0.4
  pour cut-out: 27.9,3.05 30.782,3.05 30.847,3.115 30.847,3.159 30.821,3.159 30.73,3.25 27.9,3.25
  pour cut-out: 32.488,10.182 32.354,10.182 32.354,9.7 32.488,9.7
  pour cut-out: 30.9,10.2 30.9,10.3 30.1,10.3 30.1,9.7 30.6,9.7 30.646,9.746
  pour cut-out: 51.25,11.275 51.25,11.35 50.45,11.35 50.45,11.154 50.704,10.9 50.95,10.9 50.996,10.946
  pour cut-out: 53.15,11.35 52.45,11.35 52.45,11.166 52.704,10.912 53.012,10.912 53.15,11.05
  pour cut-out: 48.85,12.554 48.85,11.373 48.966,11.32 48.996,11.347 48.996,12.454
  pour cut-out: 34.132,0.846 34.132,0.567 34.3,0.4 33.65,0.4 33.65,0.846
  pour cut-out: 35.204,2.554 35.204,3.146 35.1,3.25 34.625,2.775 33.6,2.775 33.6,2.65 33.95,2.3 35.15,2.3 35.2,2.35
  pour cut-out: 110.631,14.593 110.093,14.593 109.668,14.168 109.668,13.585 110.505,12.748 110.524,12.767 110.631,12.767
  pour cut-out: 34.665,31.183 34.648,31.2 32.6,31.2 32,30.6 33.792,30.6 33.869,30.522 34.004,30.522
  pour cut-out: 36.561,30.398 36.561,27.702 36.559,27.7 35.622,28.637 35.622,28.822 35.581,28.863 36.2,29.482 36.2,29.8
  pour cut-out: 43.85,5.75 47.445,5.75 47.445,7.108 47.347,7.206 46.906,7.206 45.8,6.1 43.8,6.1
  pour cut-out: 29.817,5.996 29.817,5.617 29.6,5.4 29.7,5.3 30.6,5.3 30.6,5.884 30.488,5.996
  pour cut-out: 10.145,26.018 9.921,26.242 9.921,27.012 10.387,26.545 10.384,26.542 10.384,26.416
  pour cut-out: 12.4,6.688 11.999,6.688 12.082,6.771 12.112,6.771
  pour cut-out: 32.5,13.6 32.964,13.136 32.964,12.13 37.598,12.13 38.069,12.6 43.416,12.6 43.665,12.849 43.665,12.917 42.982,13.6

## Silkscreen, mask and mechanical layers (free items; w line width, h text height)
Mechanical 1:
  lines w0.254: -2.508,1.524 -2,0 ; -2.508,34.976 -2,36.5 ; -2.254,0 -1.746,0 ; -2.254,36.5 -1.746,36.5 ; -2,11.75 -2,0 ; -2,24.75 -2,36.5 ; -1.492,1.524 -2,0 ; -1.492,34.976 -2,36.5 ; 0,-3.004 0,-2.496 ; 1.523,-3.261 0,-2.75 ; 1.525,-2.245 0,-2.75 ; 58.261,-2.864 0,-2.75 ; 69.739,-2.886 128,-3 ; 126.475,-3.505 128,-3 ; 126.477,-2.489 128,-3 ; 128,-3.254 128,-2.746 ; -0.1,0 -0.1,36.5 128,36.5 128,0 -0.1,0
  text "36.5 (mm)" at -1.086,12.004 h1.52 r90
  text "128 (mm)" at 58.514,-3.778 h1.52 r359.89
Mechanical 7:
  lines w0.7: 36.667,18.243 ccw(c33.961,17.751) 36.7,18 ; 46.667,18.143 ccw(c43.961,17.651) 46.7,17.9
  lines w5.2: 43.6,37 43.6,24.6 50.6,17.6 61.4,17.6 ; 62.3,17.5 68.55,11.25 81.5,11.25
  lines w15.5: 88.75,5.5 88.75,31.25
Drill Drawing:
  text ".legend" at 2.6,59.7 h1.52

## Text inside footprints (layer, text, board x,y; h text height)
*1: Drill Drawing "PTH" at 2.7,28.5 h1.2
*2: Drill Drawing "PTH" at 123.1,28.3 h1.2
*3: Drill Drawing "PTH" at 2.6,-0.5 h1.2
*4: Drill Drawing "PTH" at 123,-0.5 h1.2
CN1: Top Overlay "1" at 111.8,18.9 h1 r90; Top Overlay "5" at 111.8,34.2 h1 r90
CN2: Top Overlay "1" at 115.5,7.5 h1 r90; Top Overlay "5" at 115.3,28.4 h1 r90
CN3: Bottom Overlay "1" at 11.45,32.656 h1 r90; Bottom Overlay "12" at 11.55,5.156 h1 r90
CN4: Top Overlay "1" at 112.1,1.4 h1 r90; Top Overlay "5" at 111.9,17.3 h1 r90
U3: Bottom Overlay "1" at 29.754,7.995 h1 r90; Bottom Overlay "2" at 29.805,5.658 h1 r90; Bottom Overlay "3" at 29.805,3.143 h1 r90; Bottom Overlay "4" at 22.845,2 h1 r90
U5: Top Overlay "3" at 69.3,34.1 h1 r90; Top Overlay "1" at 71.8,26.3 h1 r90; Top Overlay "4" at 58.2,27.4 h1 r90